# Altium PCB Control_CPUBoard_PCB.PcbDoc (part 2 of 2)
Units mm, origin at the board's own origin, x right, y up, seen from the top; angles counter-clockwise.
Board outline 140 x 120 mm, 2 copper layers (Top Layer, Bottom Layer); 146 components, 135 nets, 512 pads, 156 vias.
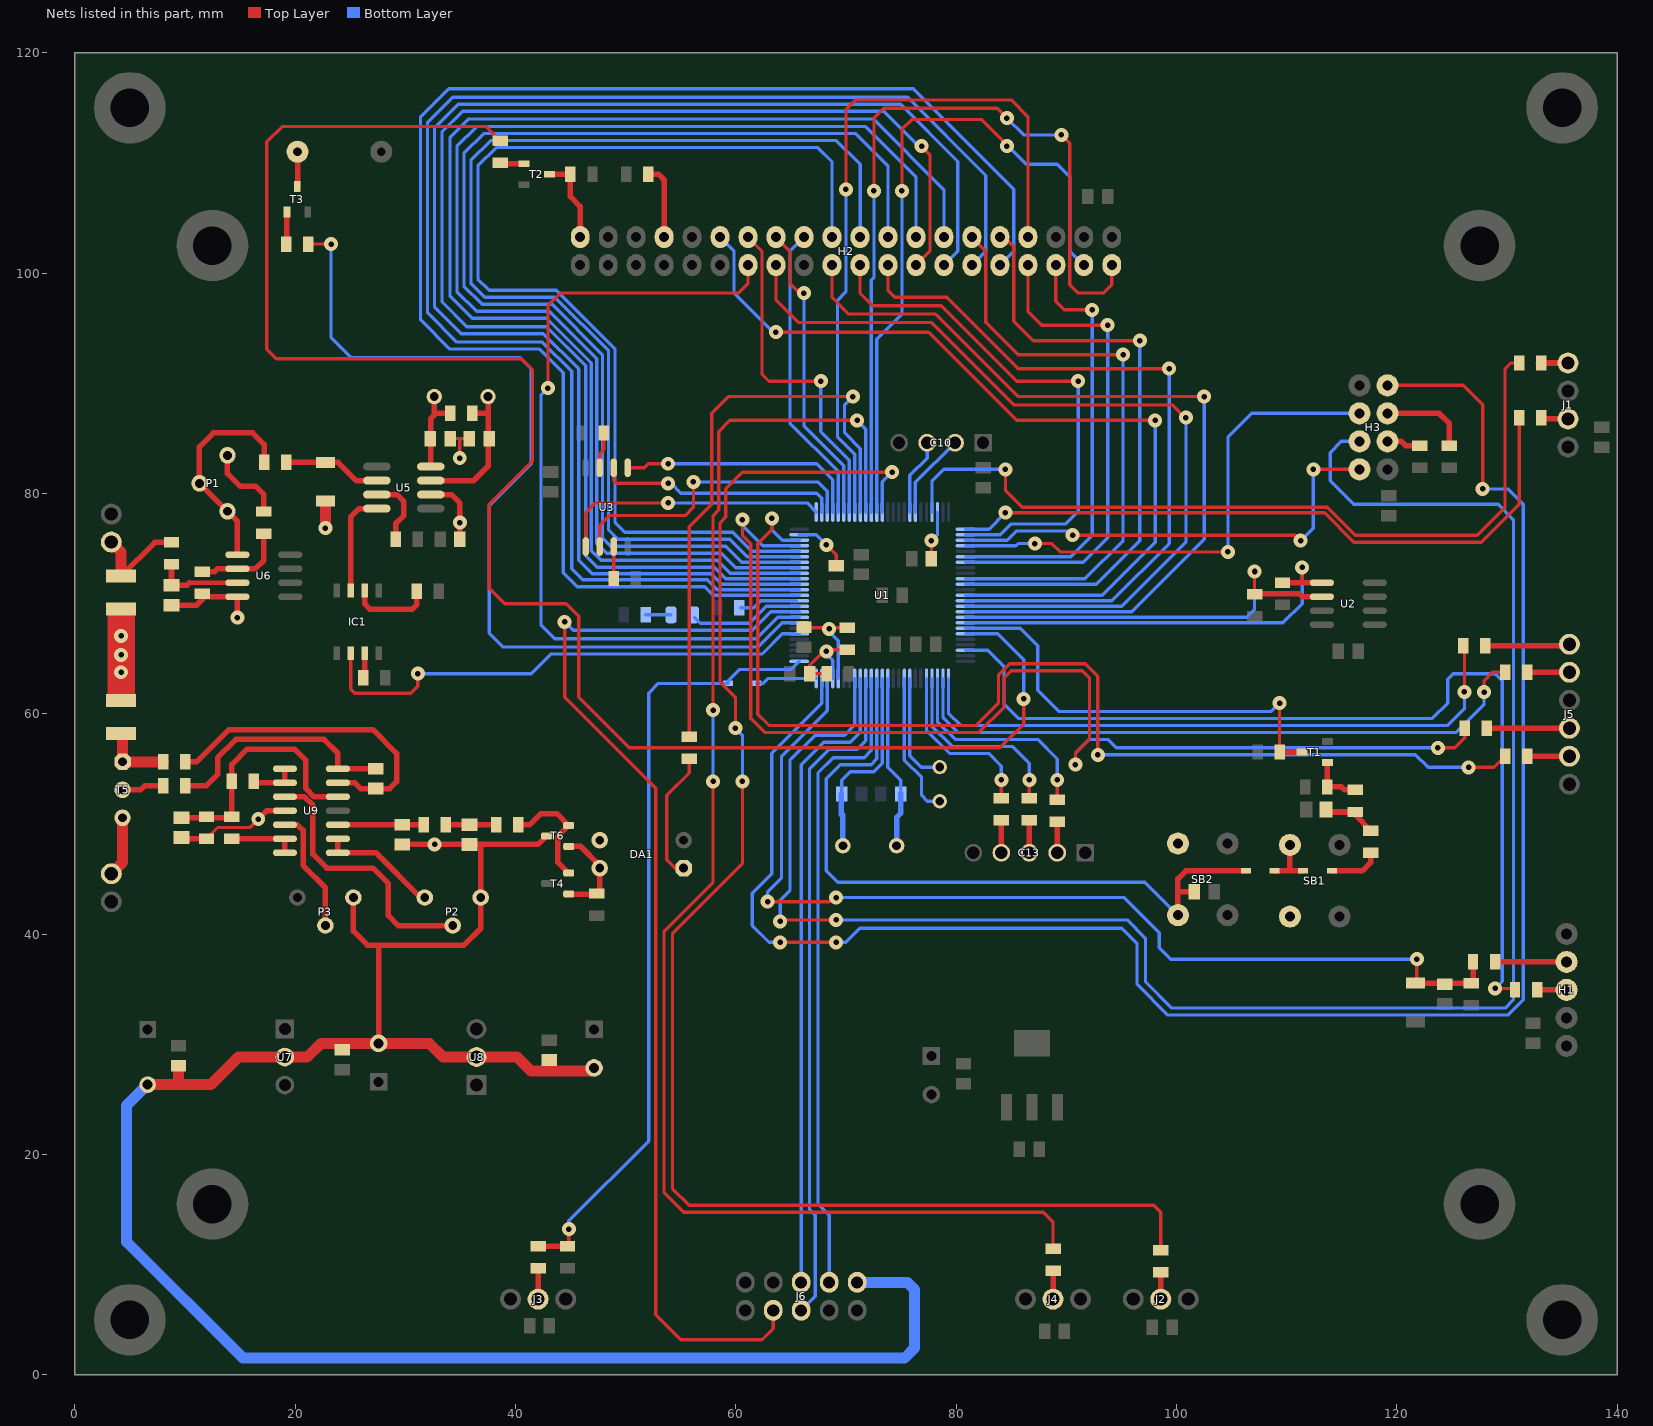
[diagram p2: the nets of this part, all layers, seen from the top]

## Via types
v1: diameter 1.27, hole 0.5, Top Layer to Bottom Layer, tented both sides, 156 vias

## Nets (pads, with @x,y where several pads share a name; then routed paths per layer and width w, separated by ;. In a path a pad name is that pad's centre, name@x,y a point inside that pad or via, vN(x,y) a via of type N, cw(c..) or ccw(c..) an arc to the next point about the centre after c; other vN are vias at no path point) (continued)
GND2: C29.2 C30.1 C31.1 C32.1 C33.2 C34.2 C35.2 C36.2 C37.2 C38.2 C40.1 C41.2 C42.1 D5.2 DA1.3 J6.2 P2.3 P3.3 R39.1 R40.1 R51.1 R53.1 T6.3 U5.2 U6.4 U7.3 U8.2 U9.11 | length 230.3
  Top Layer w0.3: R53.1@11.957,48.676 12.957,49.676 15.894,49.676 v1(16.656,50.438) ; C32.1@34.066,84.982 34.944,84.982 ; v1(34.944,83.204) 34.944,84.982 ; C31.1@35.822,84.982 34.944,84.982
  Top Layer w0.5: C30.1@8.782,69.858 11.073,69.858 11.846,70.631 U6.4@14.764,70.631 v1(14.764,68.739) ; C42.1@9.787,48.66 11.973,48.66 R53.1@11.957,48.676 ; v1(16.656,50.438) 17.418,51.2 U9.11@19.082,51.2 ; P3.3@25.292,43.326 25.292,40.278 26.562,39.008 27.578,39.008 ; C35.2@27.578,30.09 27.578,39.008 ; C41.2@29.737,48.141 v1(32.658,48.141) C40.1@35.833,48.141 42.061,48.141 T6.3@42.834,48.914 ; U5.2@32.314,79.902 34.182,79.902 34.955,79.129 v1(34.955,77.351) C29.2@34.955,75.838 ; 36.849,48.014 P2.3@36.849,43.326 36.849,40.532 35.325,39.008 27.578,39.008
  Top Layer w1: C38.2@6.623,26.348 9.417,26.348 ; C33.2@9.417,28.075 9.417,26.348 ; v1(22.752,76.854) D5.2@22.752,79.295 ; U8.2@36.468,28.467 36.849,28.848 40.151,28.848 41.421,27.578 46.854,27.578 C37.2@47.136,27.86 ; U8.2@36.468,28.848 33.42,28.848 32.178,30.09 C35.2@27.578,30.09 22.343,30.09 21.101,28.848 U7.3@19.069,28.848 14.878,28.848 12.378,26.348 9.417,26.348
  Top Layer w2.5: 4.21,61.995 v1(4.21,63.773) v1(4.21,65.361) v1(4.21,67.075) 4.21,68.726
  Bottom Layer w1: C38.2@6.623,26.348 4.718,24.443 4.718,12.084 15.259,1.543 75.33,1.543 76.219,2.432 76.219,7.766 75.584,8.401 J6.2@71.012,8.401
NetC1_1: C1.1 R2.2 R3.1 | length 4.5
  Top Layer w0.5: C1.1@113.711,51.089 R3.1@116.224,51.089 ; R3.1@116.224,50.803 R2.2@117.621,49.406
NetC3_2: C3.2 D2.2 SB2.2 U1.14 | length 65.9
  Top Layer w0.5: SB2.2@100.131,41.727 100.131,43.707 ; C3.2@101.608,43.834 100.258,43.834 100.131,43.707 ; D2.2@106.288,45.739 100.857,45.739 100.131,45.013 100.131,43.707
  Bottom Layer w0.3: U1.14@72.798,63.208 72.798,55.907 72.282,55.391 69.488,55.391 68.218,54.121 68.218,45.739 69.234,44.723 97.135,44.723 SB2.2@100.131,41.727
NetC7_2: C7.2 R11.1 U1.21 | length 7.6
  Top Layer w0.3: C7.2@66.721,67.821 R11.1@69.488,67.821
  Bottom Layer w0.3: v1(68.472,67.71) 68.472,67.456 69.298,66.63 U1.21@69.298,63.208
NetC10_2: C10.2 U1.69 | length 7.8
  Bottom Layer w0.3: U1.69@76.298,78.308 76.298,80.997 C10.2@79.902,84.601
NetC10_3: C10.3 U1.68 | length 6.9
  Bottom Layer w0.3: U1.68@75.798,78.308 75.798,81.64 77.362,83.204 C10.3@77.362,84.601
NetC12_2: C12.2 R11.2 R12.1 U1.22 | length 8.9
  Top Layer w0.3: R12.1@68.234,63.646 C12.2@66.705,63.646 66.705,64.419 67.964,65.678 68.107,65.821 R11.2@69.869,65.821
  Bottom Layer w0.3: v1(68.218,65.678) 68.091,65.551 68.798,64.844 U1.22@68.798,63.208
NetC13_2: C13.2 R13.1 | length 2.8
  Top Layer w0.5: C13.2@89.173,47.39 R13.1@89.173,50.2
NetC13_3: C13.3 R15.1 | length 2.9
  Top Layer w0.5: C13.3@86.633,47.39 R15.1@86.633,50.327
NetC13_4: C13.4 R14.1 | length 2.9
  Top Layer w0.5: C13.4@84.093,47.39 R14.1@84.093,50.327
NetC14_2: C14.2 Q1.1 U1.13 | length 18.1
  Bottom Layer w0.3: C14.2@69.604,52.724 69.604,53.983 70.377,54.756 72.536,54.756 73.298,55.518 U1.13@73.298,63.208
  Bottom Layer w0.5: C14.2@69.588,52.708 69.588,50.846 69.715,50.846 Q1.1@69.715,48.025
NetC15_2: C15.2 Q1.2 U1.12 | length 15.8
  Bottom Layer w0.3: U1.12@73.798,63.208 73.798,55.145 74.96,53.983 C15.2@74.96,52.724
  Bottom Layer w0.5: Q1.2@74.595,48.025 74.595,50.592 74.96,50.957 C15.2@74.96,52.724
NetC16_2: C16.2 U1.73 | length 5
  Top Layer w0.3: v1(77.743,75.711) 77.754,75.7 C16.2@77.754,73.552
  Bottom Layer w0.3: v1(77.743,75.711) 78.298,76.266 U1.73@78.298,78.308
NetC17_2: C17.2 U1.49 | length 5.1
  Top Layer w0.3: v1(68.218,75.33) 69.107,74.441 C17.2@69.107,73.436
  Bottom Layer w0.3: U1.49@65.748,76.258 67.29,76.258 v1(68.218,75.33)
NetC20_2: C20.2 D3.1 R19.1 R20.2 U1.23 | length 93.9
  Top Layer w0.3: v1(62.884,42.945) 68.472,42.945 v1(69.107,43.326) ; D3.1@121.558,35.678 121.812,35.932 v1(121.812,37.738)
  Top Layer w0.5: D3.1@121.685,35.551 126.753,35.551 R20.2@126.765,35.563 126.908,35.706 R19.1@126.908,37.484
  Bottom Layer w0.3: v1(62.884,42.945) 62.884,43.834 64.154,45.104 64.154,56.153 68.298,60.297 U1.23@68.298,63.208 ; v1(69.107,43.326) 95.269,43.326 98.444,40.151 98.444,38.754 99.46,37.738 v1(121.812,37.738)
NetC30_2: C30.2 R38.2 U6.3 | length 8
  Top Layer w0.4: 10.433,71.901 U6.3@14.764,71.901
  Top Layer w0.5: R38.2@8.782,73.568 C30.2@8.782,71.658 10.19,71.658 10.433,71.901
NetC31_2: C31.2 Q2.1 R41.1 U5.3 | length 13.5
  Top Layer w0.5: U5.3@32.314,81.172 36.214,81.172 37.511,82.469 37.511,87.268 ; R41.1@36.071,87.268 37.511,87.268 ; Q2.1@37.511,88.792 37.511,87.268
NetC32_2: C32.2 Q2.2 R41.2 U5.4 | length 8
  Top Layer w0.5: U5.4@32.314,82.442 32.314,86.797 32.631,87.114 ; Q2.2@32.631,88.792 32.631,87.114 ; R41.2@34.071,87.268 32.785,87.268 32.631,87.114
NetC39_1: C39.1 R50.1 U9.6 | length 29.7
  Top Layer w0.5: R50.1@10.036,55.645 11.068,55.645 13.989,58.566 27.07,58.566 29.218,56.418 29.218,53.856 28.583,53.221 C39.1@27.324,53.221 25.938,53.221 25.419,53.74 U9.6@23.882,53.74
NetC39_2: C39.2 R46.1 U9.7 | length 21.8
  Top Layer w0.5: R46.1@10.036,53.486 11.957,53.486 12.973,54.502 12.973,56.026 14.624,57.677 22.625,57.677 23.882,56.42 U9.7@23.882,55.01 C39.2@27.313,55.01
NetC40_2: C40.2 R47.2 R48.1 | length 4.6
  Top Layer w0.5: R48.1@33.658,49.93 R47.2@38.262,49.93
NetC41_1: C41.1 R48.2 U9.3 | length 7.8
  Top Layer w0.5: U9.3@23.882,49.93 R48.2@31.658,49.93
NetC42_2: C42.2 R45.2 R52.2 R53.2 U9.5 | length 22.8
  Top Layer w0.5: C42.2@9.671,50.576 14.143,50.576 R52.2@14.243,50.676 14.259,50.692 R45.2@14.259,53.867 14.259,55.407 15.64,56.788 19.958,56.788 20.974,55.772 20.974,53.232 21.736,52.47 U9.5@23.882,52.47
NetD1_1: D1.1 D2.1 SB1.2 | length 4.9
  Top Layer w0.5: D2.1@108.888,45.739 D1.1@111.495,45.739 ; 110.291,45.775 SB1.2@110.291,48.1
NetD1_2: D1.2 R2.1 | length 4.7
  Top Layer w0.5: D1.2@114.095,45.739 116.859,45.739 117.621,46.501 R2.1@117.621,47.406
NetD4_1: D4.1 U1.25 | length 5.6
  Bottom Layer w0.3: D4.1@61.898,62.757 62.503,62.757 62.954,63.208 U1.25@67.298,63.208
NetD4_2: D4.2 R23.1 R24.1 U1.26 | length 70.7
  Top Layer w0.3: R23.1@44.85,11.814 v1(44.85,13.227)
  Top Layer w0.5: R24.1@42.056,11.687 R23.1@44.723,11.687
  Bottom Layer w0.3: v1(44.85,13.227) 44.85,13.989 52.089,21.228 52.089,61.868 52.978,62.757 D4.2@59.298,62.757 59.298,62.981 60.344,64.027 65.017,64.027 U1.26@65.748,64.758
NetD5_1: D5.1 R37.2 U5.6 | length 8.9
  Top Layer w0.5: R37.2@19.18,82.823 23.895,82.823 25.546,81.172 U5.6@27.414,81.172
NetDA1_1: DA1.1 R49.2 | length 11.8
  Top Layer w0.3: DA1.1@55.264,45.993 54.502,45.993 53.74,46.755 53.74,52.597 55.772,54.629 R49.2@55.772,55.915
NetDA1_4: DA1.4 R44.1 T4.1 T6.1 | length 8.8
  Top Layer w0.5: T4.1@44.834,43.646 47.345,43.646 R44.1@47.39,43.691 47.644,43.945 DA1.4@47.644,45.993 47.644,46.247 45.927,47.964 T6.1@44.834,47.964
NetH1_3: H1.3 R18.2 | length 2.7
  Top Layer w0.5: R18.2@132.718,34.944 H1.3@135.401,34.944
NetH1_4: H1.4 R19.2 | length 6.5
  Top Layer w0.5: R19.2@128.908,37.484 H1.4@135.401,37.484
NetH2_2: H2.2 U1.61 | length 74.4
  Top Layer w0.3: v1(72.536,107.461) 72.536,114.065 73.425,114.954 83.712,114.954 v1(84.601,114.065) ; v1(89.554,112.541) 90.316,111.779 90.316,98.952 91.078,98.19 93.364,98.19 94.13,98.956 H2.2@94.13,100.73
  Bottom Layer w0.3: U1.61@72.298,78.308 72.298,99.349 72.536,99.587 v1(72.536,107.461) ; v1(84.601,114.065) 86.125,112.541 v1(89.554,112.541)
NetH2_4: H2.4 U1.62 | length 62.4
  Top Layer w0.3: v1(75.076,107.461) 75.076,113.049 75.965,113.938 82.315,113.938 84.411,111.843 84.601,112.033 v1(84.601,111.525)
  Bottom Layer w0.3: U1.62@72.798,78.308 72.798,94.007 75.076,96.285 v1(75.076,107.461) ; v1(84.601,111.525) 84.728,111.525 86.379,109.874 89.173,109.874 90.316,108.731 90.316,102.004 H2.4@91.59,100.73
NetH2_6: H2.6 U1.81 | length 39.7
  Top Layer w0.3: H2.6@89.05,100.73 89.05,97.424 89.808,96.666 v1(92.348,96.666)
  Bottom Layer w0.3: U1.81@80.848,74.258 90.387,74.258 92.348,76.219 v1(92.348,96.666)
NetH2_7: H2.7 U1.58 | length 65.9
  Top Layer w0.3: v1(69.996,107.588) 69.996,114.827 70.885,115.716 84.982,115.716 86.51,114.188 H2.7@86.51,103.27
  Bottom Layer w0.3: v1(69.996,107.588) 69.996,98.317 69.234,97.555 69.234,85.109 70.798,83.545 U1.58@70.798,78.308
NetH2_8: H2.8 U1.82 | length 45.1
  Top Layer w0.3: H2.8@86.51,100.73 86.51,96.535 87.776,95.269 v1(93.745,95.269)
  Bottom Layer w0.3: U1.82@80.848,73.758 91.538,73.758 93.745,75.965 v1(93.745,95.269)
NetH2_9: H2.9 U1.86 | length 56.1
  Top Layer w0.3: H2.9@83.97,103.27 84.347,103.27 85.236,102.381 85.236,95.65 87.014,93.872 v1(96.666,93.872)
  Bottom Layer w0.3: U1.86@80.848,71.758 92.713,71.758 96.666,75.711 v1(96.666,93.872)
NetH2_10: H2.10 U1.38 | length 139.8
  Bottom Layer w0.3: U1.38@65.748,70.758 57.931,70.758 57.169,71.52 45.612,71.52 44.342,72.79 44.342,90.951 42.183,93.11 34.055,93.11 31.388,95.777 31.388,114.192 33.928,116.732 76.092,116.732 85.236,107.588 85.236,101.996 H2.10@83.97,100.73
NetH2_11: H2.11 U1.85 | length 54.5
  Top Layer w0.3: H2.11@81.43,103.27 82.696,102.004 82.696,95.523 85.617,92.602 v1(95.142,92.602)
  Bottom Layer w0.3: U1.85@80.848,72.258 91.689,72.258 95.142,75.711 v1(95.142,92.602)
NetH2_12: H2.12 U1.39 | length 135.6
  Top Layer w0.3: H2.12@81.43,100.73 H2.12@81.934,100.73
  Bottom Layer w0.3: U1.39@65.748,71.258 58.32,71.258 57.423,72.155 46.12,72.155 45.104,73.171 45.104,91.078 42.437,93.745 34.69,93.745 32.023,96.412 32.023,113.684 34.309,115.97 75.584,115.97 82.696,108.858 82.696,101.996 H2.12@81.43,100.73
NetH2_13: H2.13 U1.42 | length 118.9
  Bottom Layer w0.3: U1.42@65.748,72.758 59.487,72.758 58.312,73.933 47.771,73.933 46.882,74.822 46.882,91.84 42.818,95.904 36.087,95.904 34.055,97.936 34.055,112.287 35.755,113.987 72.487,113.987 78.89,107.584 H2.13@78.89,103.27
NetH2_14: H2.14 U1.40 | length 130.4
  Bottom Layer w0.3: U1.40@65.748,71.758 58.709,71.758 57.756,72.711 46.961,72.711 45.739,73.933 45.739,91.298 42.53,94.507 35.071,94.507 32.658,96.92 32.658,113.176 34.817,115.335 74.949,115.335 80.156,110.128 80.156,101.996 H2.14@78.89,100.73
NetH2_15: H2.15 U1.43 | length 114.2
  Bottom Layer w0.3: U1.43@65.748,73.258 60.003,73.258 58.693,74.568 48.279,74.568 47.39,75.457 47.39,92.221 43.072,96.539 36.468,96.539 34.69,98.317 34.69,111.525 36.468,113.303 71.774,113.303 76.35,108.727 H2.15@76.35,103.27
NetH2_16: H2.16 U1.41 | length 125.6
  Top Layer w0.3: H2.16@76.35,100.73 77.616,101.996 77.616,110.763 v1(76.854,111.525)
  Bottom Layer w0.3: U1.41@65.748,72.258 59.098,72.258 58.058,73.298 47.41,73.298 46.374,74.334 46.374,91.586 42.818,95.142 35.574,95.142 33.333,97.383 33.333,112.835 35.198,114.7 73.425,114.7 76.6,111.525 v1(76.854,111.525)
NetH2_17: H2.17 U1.44 | length 109.5
  Bottom Layer w0.3: U1.44@65.748,73.758 60.519,73.758 59.074,75.203 48.66,75.203 47.898,75.965 47.898,92.602 43.326,97.174 36.976,97.174 35.325,98.825 35.325,110.89 37.103,112.668 70.885,112.668 73.81,109.743 H2.17@73.81,103.27
NetH2_18: H2.18 U1.89 | length 67.3
  Top Layer w0.3: H2.18@73.81,100.73 73.81,98.44 74.441,97.809 79.14,97.809 85.617,91.332 v1(99.333,91.332)
  Bottom Layer w0.3: U1.89@80.848,70.258 94.134,70.258 99.333,75.457 v1(99.333,91.332)
NetH2_19: H2.19 U1.45 | length 104.3
  Bottom Layer w0.3: U1.45@65.748,74.258 61.035,74.258 59.455,75.838 49.295,75.838 48.45,76.683 48.45,92.939 43.58,97.809 37.23,97.809 35.96,99.079 35.96,110.255 37.738,112.033 69.107,112.033 71.281,109.859 71.281,103.281 H2.19@71.27,103.27
NetH2_20: H2.20 U1.77 | length 48.6
  Top Layer w0.3: H2.20@71.27,100.73 71.27,98.186 72.409,97.047 78.632,97.047 85.49,90.189 v1(91.078,90.189)
  Bottom Layer w0.3: U1.77@80.848,76.258 84.005,76.258 84.982,77.235 89.935,77.235 91.078,78.378 v1(91.078,90.189)
NetH2_21: H2.21 U1.46 | length 99.1
  Bottom Layer w0.3: U1.46@65.748,74.758 61.424,74.758 59.709,76.473 49.93,76.473 49.041,77.362 49.041,93.11 43.707,98.444 37.611,98.444 36.595,99.46 36.595,109.747 38.246,111.398 67.456,111.398 68.73,110.124 H2.21@68.73,103.27
NetH2_22: H2.22 U1.91 | length 77.8
  Top Layer w0.3: H2.22@68.73,100.73 68.73,97.805 70.25,96.285 78.124,96.285 85.617,88.792 v1(102.508,88.792)
  Bottom Layer w0.3: U1.91@80.848,69.258 95.928,69.258 102.508,75.838 v1(102.508,88.792)
NetH2_23: H2.23 U1.55 | length 27.3
  Bottom Layer w0.3: H2.23@66.19,103.27 64.916,101.996 64.916,86.379 69.298,81.997 U1.55@69.298,78.308
NetH2_25: H2.25 U1.56 | length 28.1
  Top Layer w0.3: H2.25@63.65,103.27 64.916,102.004 64.916,99.079 65.805,98.19 v1(66.186,98.19)
  Bottom Layer w0.3: v1(66.186,98.19) 65.932,98.19 66.186,97.936 66.186,86.125 69.798,82.513 U1.56@69.798,78.308
NetH2_26: H2.26 U1.90 | length 78.6
  Top Layer w0.3: H2.26@63.65,100.73 63.65,97.551 65.678,95.523 77.743,95.523 85.236,88.03 99.629,88.03 100.857,86.802 v1(100.857,86.887)
  Bottom Layer w0.3: U1.90@80.848,69.758 95.031,69.758 100.857,75.584 v1(100.857,86.887)
NetH2_27: H2.27 U1.57 | length 31.5
  Top Layer w0.3: H2.27@61.11,103.27 62.376,102.004 62.376,90.824 63.011,90.189 v1(67.71,90.189)
  Bottom Layer w0.3: v1(67.71,90.189) 67.71,85.617 70.298,83.029 U1.57@70.298,78.308
NetH2_28: H2.28 U1.34 | length 74.6
  Top Layer w0.3: v1(42.945,89.554) 42.945,97.047 44.088,98.19 60.217,98.19 61.11,99.083 H2.28@61.11,100.73
  Bottom Layer w0.3: v1(42.945,89.554) 42.31,88.919 42.31,68.091 43.58,66.821 61.868,66.821 63.805,68.758 U1.34@65.748,68.758
NetH2_29: H2.29 U1.88 | length 78.9
  Top Layer w0.3: v1(63.646,94.634) 77.489,94.634 85.49,86.633 v1(98.063,86.633)
  Bottom Layer w0.3: H2.29@58.57,103.27 59.836,102.004 59.836,98.19 63.392,94.634 v1(63.646,94.634) ; U1.88@80.848,70.758 93.237,70.758 98.063,75.584 v1(98.063,86.633)
NetH2_33: H2.33 R22.2 | length 6.8
  Top Layer w0.5: R22.2@52.073,108.985 52.978,108.985 53.49,108.473 H2.33@53.49,103.27
NetH2_39: H2.39 R28.1 T2.3 | length 8
  Top Layer w0.5: T2.3@43.079,108.985 R28.1@44.993,108.985 44.993,106.937 45.87,106.06 H2.39@45.87,103.27
NetH3_1: H3.1 U1.24 | length 168.4
  Top Layer w0.3: v1(64.027,39.262) v1(69.107,39.262) ; H3.1@119.145,89.808 126.003,89.808 127.781,88.03 v1(127.781,80.41)
  Bottom Layer w0.3: v1(64.027,39.262) 63.011,39.262 61.487,40.786 61.487,43.707 63.265,45.485 63.265,56.407 67.798,60.94 U1.24@67.798,63.208 ; v1(69.107,39.262) 69.996,39.262 71.266,40.532 95.015,40.532 96.412,39.135 96.412,35.452 99.206,32.658 130.067,32.658 131.464,34.055 131.464,79.013 130.067,80.41 v1(127.781,80.41)
NetH3_3: H3.3 R26.1 | length 8
  Top Layer w0.5: H3.3@119.145,87.268 123.844,87.268 124.733,86.379 R26.1@124.733,84.331
NetH3_4: H3.4 U1.79 | length 47.5
  Top Layer w0.3: v1(87.141,75.457) 88.665,75.457 89.427,74.695 v1(104.667,74.695)
  Bottom Layer w0.3: U1.79@80.848,75.258 85.418,75.258 85.617,75.457 v1(87.141,75.457) ; v1(104.667,74.695) 104.667,85.109 106.826,87.268 H3.4@116.605,87.268
NetH3_5: H3.5 R27.1 | length 3.1
  Top Layer w0.5: H3.5@119.145,84.728 120.415,84.728 120.812,84.331 R27.1@122.066,84.331
NetH3_6: H3.6 U1.18 | length 166.2
  Top Layer w0.3: v1(64.027,41.167) 64.154,41.294 v1(69.107,41.294)
  Bottom Layer w0.3: v1(64.027,41.167) 64.027,43.072 64.916,43.961 64.916,55.772 67.202,58.058 69.869,58.058 70.798,58.987 U1.18@70.798,63.208 ; v1(69.107,41.294) 95.523,41.294 97.174,39.643 97.174,35.706 99.587,33.293 129.813,33.293 130.575,34.055 130.575,77.616 129.178,79.013 116.097,79.013 113.938,81.172 113.938,83.712 114.954,84.728 H3.6@116.605,84.728
NetH3_8: H3.8 U1.78 | length 42.2
  Top Layer w0.3: v1(90.57,76.219) 110.763,76.219 v1(111.271,75.711) ; v1(112.414,82.188) H3.8@116.605,82.188
  Bottom Layer w0.3: U1.78@80.848,75.758 84.648,75.758 85.49,76.6 90.189,76.6 v1(90.57,76.219) ; v1@111.318,75.758 112.414,76.854 v1(112.414,82.188)
NetHA1_2: HA1.2 T3.3 | length 3.2
  Top Layer w0.5: T3.3@20.222,107.859 HA1.2@20.222,111.017
NetIC1_2: IC1.2 R42.1 | length 7.5
  Top Layer w0.5: IC1.2@26.308,71.195 26.308,69.996 26.816,69.488 30.626,69.488 31.023,69.885 R42.1@31.023,71.139
NetIC1_3: IC1.3 U5.8 | length 9.4
  Top Layer w0.5: IC1.3@25.038,71.195 25.038,77.87 25.8,78.632 U5.8@27.414,78.632
NetIC1_6: IC1.6 U1.31 | length 47
  Top Layer w0.3: IC1.6@25.038,65.495 25.038,62.249 25.419,61.868 30.499,61.868 31.134,62.503 v1(31.134,63.646)
  Bottom Layer w0.3: v1(31.134,63.646) 41.421,63.646 43.199,65.424 62.376,65.424 64.21,67.258 U1.31@65.748,67.258
NetIC1_7: IC1.7 R43.1 | length 2.2
  Top Layer w0.5: R43.1@26.308,63.265 IC1.7@26.308,65.495
NetJ1_2: J1.2 R4.2 | length 2.3
  Top Layer w0.5: R4.2@133.226,86.76 J1.2@135.528,86.76
NetJ1_4: J1.4 R5.2 | length 2.7
  Top Layer w0.5: R5.2@132.845,91.84 J1.4@135.528,91.84
NetJ2_2: J2.2 R21.2 | length 2.4
  Top Layer w0.5: J2.2@98.571,6.877 R21.2@98.571,9.306
NetJ3_2: J3.2 R24.2 | length 2.8
  Top Layer w0.5: J3.2@42.056,6.877 R24.2@42.056,9.687
NetJ4_2: J4.2 R25.2 | length 2.6
  Top Layer w0.5: J4.2@88.792,6.877 R25.2@88.792,9.433
NetJ5_2: J5.2 R29.2 | length 3.8
  Top Layer w0.5: R29.2@131.829,56.153 J5.2@135.655,56.153
NetJ5_3: J5.3 R31.2 | length 7.5
  Top Layer w0.5: R31.2@128.146,58.693 J5.3@135.655,58.693
NetJ5_5: J5.5 R30.2 | length 3.8
  Top Layer w0.5: R30.2@131.829,63.773 J5.5@135.655,63.773
NetJ5_6: J5.6 R34.2 | length 7.5
  Top Layer w0.5: R34.2@128.019,66.186 J5.6@135.528,66.186
NetJ6_4: J6.4 U1.15 | length 58.9
  Bottom Layer w0.3: J6.4@68.472,8.401 68.472,14.497 67.456,15.513 67.456,54.629 68.853,56.026 71.647,56.026 72.298,56.677 U1.15@72.298,63.208
NetJ6_5: J6.5 U1.16 | length 61.7
  Bottom Layer w0.3: J6.5@65.932,5.861 67.202,7.131 67.202,14.497 66.694,15.005 66.694,55.01 68.472,56.788 71.012,56.788 71.798,57.574 U1.16@71.798,63.208
NetJ6_6: J6.6 U1.17 | length 58.4
  Bottom Layer w0.3: J6.6@65.932,8.401 65.932,55.391 67.964,57.423 70.377,57.423 71.298,58.344 U1.17@71.298,63.208
NetJ6_7: J6.7 U1.35 | length 102.3
  Top Layer w0.3: v1(44.469,68.345) 44.469,61.487 52.724,53.232 52.724,5.48 55.01,3.194 62.376,3.194 63.392,4.21 J6.7@63.392,5.861
  Bottom Layer w0.3: v1(44.469,68.345) 45.231,67.583 61.487,67.583 63.162,69.258 U1.35@65.748,69.258
NetJ7_2: J7.2 R38.1 R39.2 | length 9.3
  Top Layer w0.5: J7.2@3.324,75.568 J7.2@3.34,75.568 ; R39.2@4.21,72.512 7.266,75.568 R38.1@8.782,75.568
  Top Layer w1: J7.2@3.324,75.584 3.34,75.568 4.21,74.698 R39.2@4.21,72.512
NetJ8_2: J8.2 T5.1 | length 5.5
  Top Layer w1: J8.2@3.319,45.485 4.337,46.504 T5.1@4.337,50.565
NetLD1_1: LD1.1 U1.36 | length 10.3
  Bottom Layer w0.3: LD1.1@56.28,68.726 56.788,68.218 61.233,68.218 62.773,69.758 U1.36@65.748,69.758
NetLD1_2: LD1.2 R9.2 | length 2.3
  Bottom Layer w0.3: R9.2@51.819,68.98 LD1.2@54.121,68.98
NetP1_1: P1.1 R36.1 | length 7.3
  Top Layer w0.5: P1.1@13.862,83.458 13.862,81.807 15.005,80.664 16.402,80.664 17.164,79.902 R36.1@17.164,78.362
NetP1_2: P1.2 P1.3 R37.1 U6.1 | length 19.7
  Top Layer w0.5: U6.1@14.764,74.441 14.764,77.476 P1.3@13.862,78.378 P1.2@11.322,80.918 11.322,84.22 12.592,85.49 16.148,85.49 17.18,84.458 R37.1@17.18,82.823
NetP2_1: P2.1 U9.1 U9.2 | length 10.8
  Top Layer w0.5: U9.2@23.882,48.66 U9.1@23.882,47.39 27.324,47.39 31.388,43.326 P2.1@31.769,43.326
NetP2_2: P2.2 U9.10 | length 24.4
  Top Layer w0.5: U9.10@19.082,52.47 20.852,52.47 21.609,51.713 21.609,47.263 22.879,45.993 27.07,45.993 28.467,44.596 28.467,41.675 29.356,40.786 P2.2@34.309,40.786
NetP3_2: P3.2 U9.12 | length 11.3
  Top Layer w0.5: U9.12@19.082,49.93 20.212,49.93 20.72,49.422 20.72,46.247 22.752,44.215 P3.2@22.752,40.786
NetR1_1: R1.1 R3.2 T1.1 | length 4.9
  Top Layer w0.5: T1.1@113.668,55.561 R1.1@113.668,53.359 114.954,53.359 115.224,53.089 R3.2@116.224,53.089
NetR4_1: R4.1 U1.76 | length 61.3
  Top Layer w0.3: v1(84.474,78.251) 113.43,78.251 116.097,75.584 127.654,75.584 131.099,79.029 R4.1@131.099,86.887
  Bottom Layer w0.3: U1.76@80.848,76.758 82.981,76.758 v1(84.474,78.251)
NetR5_1: R5.1 U1.72 | length 74
  Top Layer w0.3: v1(84.474,82.188) 84.474,80.283 85.998,78.759 113.684,78.759 116.224,76.219 127.273,76.219 129.813,78.759 129.813,91.332 130.321,91.84 R5.1@131.099,91.84
  Bottom Layer w0.3: U1.72@77.798,78.308 77.798,81.1 78.886,82.188 v1(84.474,82.188)
NetR6_1: R6.1 U1.37 | length 5.3
  Bottom Layer w0.3: R6.1@60.455,69.615 61.614,69.615 62.257,70.258 U1.37@65.494,70.258
NetR7_2: R7.2 T1.3 U1.94 | length 40.8
  Top Layer w0.3: R7.2@109.35,56.534 v1(109.35,60.963)
  Top Layer w0.5: R7.2@109.35,56.534 T1.3@111.391,56.534
  Bottom Layer w0.3: U1.94@80.848,67.758 85.823,67.758 87.395,66.186 87.395,62.122 89.3,60.217 108.604,60.217 v1(109.35,60.963)
NetR8_1: R8.1 U1.92 U2.6 | length 37.9
  Top Layer w0.3: R8.1@107.08,71.028 v1(107.08,72.917)
  Top Layer w0.5: R8.1@107.223,70.885 111.144,70.885 111.398,70.631 U2.6@113.189,70.631
  Bottom Layer w0.3: U1.92@80.848,68.758 106.35,68.758 107.08,69.488 v1(107.08,72.917)
NetR10_1: R10.1 U1.93 U2.5 | length 39.4
  Top Layer w0.3: 111.398,71.901 v1(111.398,73.298)
  Top Layer w0.5: R10.1@109.763,71.901 111.398,71.901 U2.5@113.189,71.901
  Bottom Layer w0.3: U1.93@80.848,68.258 109.66,68.258 111.398,69.996 v1(111.398,73.298)
NetR13_2: R13.2 U1.3 | length 19.9
  Top Layer w0.3: R13.2@89.173,52.2 v1(89.173,53.994)
  Bottom Layer w0.3: U1.3@78.298,63.208 78.298,59.281 79.902,57.677 87.395,57.677 89.173,55.899 v1(89.173,53.994)
NetR14_2: R14.2 U1.5 | length 15.8
  Top Layer w0.3: R14.2@84.093,52.327 v1(84.093,53.994)
  Bottom Layer w0.3: U1.5@77.298,63.208 77.298,58.503 79.394,56.407 82.95,56.407 84.093,55.264 v1(84.093,53.994)
NetR15_2: R15.2 U1.4 | length 17.7
  Top Layer w0.3: R15.2@86.633,52.327 v1(86.633,53.994)
  Bottom Layer w0.3: U1.4@77.798,63.208 77.798,58.892 79.648,57.042 85.109,57.042 86.633,55.518 v1(86.633,53.994)
NetR16_1: R16.1 U3.3 | length 2.9
  Top Layer w0.3: R16.1@48.914,72.298 U3.3@48.914,75.184
NetR17_1: R17.1 U3.7 | length 3.3
  Top Layer w0.3: U3.7@47.644,82.334 47.644,83.585 48.009,83.95 R17.1@48.009,85.49
NetR18_1: R18.1 U1.98 | length 86.4
  Top Layer w0.3: v1(128.924,35.071) R18.1@130.591,35.071
  Bottom Layer w0.3: U1.98@80.848,65.758 82.87,65.758 84.347,64.281 84.347,60.852 85.617,59.582 123.209,59.582 124.606,60.979 124.606,63.138 125.114,63.646 128.924,63.646 129.559,63.011 129.559,35.706 v1(128.924,35.071)
NetR21_1: R21.1 U1.63 | length 135.6
  Top Layer w0.3: v1(59.963,58.693) 59.963,61.487 58.566,62.884 58.566,77.362 59.074,77.87 59.074,80.41 60.598,81.934 v1(74.187,81.934) ; v1(60.598,53.867) 60.598,46.374 54.248,40.024 54.248,16.91 55.772,15.386 97.936,15.386 98.571,14.751 R21.1@98.571,11.306
  Bottom Layer w0.3: v1(59.963,58.693) 60.598,58.058 v1(60.598,53.867) ; U1.63@73.298,78.308 73.298,81.045 v1(74.187,81.934)
NetR25_1: R25.1 U1.60 | length 131.6
  Top Layer w0.3: v1(57.931,53.867) 57.931,44.723 53.486,40.278 53.486,16.529 55.264,14.751 87.903,14.751 88.792,13.862 R25.1@88.792,11.433 ; v1(57.931,60.344) 57.931,77.997 58.439,78.505 58.439,85.617 59.455,86.633 v1(71.012,86.633)
  Bottom Layer w0.3: v1(57.931,53.867) v1(57.931,60.344) ; v1(71.012,86.633) 71.798,85.847 U1.60@71.798,78.308
NetR29_1: R29.1 U1.48 | length 102.6
  Top Layer w0.3: v1(63.265,77.743) 63.265,76.727 61.995,75.457 61.995,59.963 63.011,58.947 81.807,58.947 83.839,60.979 83.839,63.519 84.855,64.535 91.713,64.535 92.856,63.392 v1(92.856,56.28) ; v1(126.511,55.137) 128.813,55.137 R29.1@129.702,56.026
  Bottom Layer w0.3: v1(63.265,77.743) 63.265,76.727 64.234,75.758 U1.48@65.748,75.758 ; v1(92.856,56.28) 121.685,56.28 122.828,55.137 v1(126.511,55.137)
NetR30_1: R30.1 U1.2 | length 58.7
  Top Layer w0.3: v1(127.908,61.979) 127.908,63.011 128.67,63.773 R30.1@129.829,63.773
  Bottom Layer w0.3: U1.2@78.798,63.208 78.798,59.67 80.156,58.312 125.368,58.312 127.908,60.852 v1(127.908,61.979)
NetR31_1: R31.1 U1.47 | length 107.1
  Top Layer w0.3: v1(60.598,77.616) 60.598,76.219 61.36,75.457 61.36,59.582 62.63,58.312 82.061,58.312 84.347,60.598 84.347,63.265 84.982,63.9 91.459,63.9 92.094,63.265 92.094,57.677 90.824,56.407 v1(90.824,55.391) ; v1(123.717,56.915) 125.241,56.915 126.146,57.82 R31.1@126.146,58.693
  Bottom Layer w0.3: v1(60.598,77.616) 60.598,77.108 62.448,75.258 U1.47@65.748,75.258 ; v1(90.824,55.391) 90.824,56.407 92.094,57.677 93.745,57.677 94.507,56.915 v1@123.844,56.915
NetR32_1: R32.1 U1.95 | length 159.3
  Top Layer w0.3: R32.1@38.627,112.017 37.341,113.303 18.815,113.303 17.418,111.906 17.418,93.11 18.307,92.221 40.532,92.221 41.548,91.205 41.548,82.95 37.611,79.013 37.611,71.393 39.008,69.996 44.596,69.996 45.739,68.853 45.739,61.487 50.311,56.915 83.966,56.915 86.125,59.074 v1(86.125,61.36)
  Bottom Layer w0.3: U1.95@80.848,67.258 83.783,67.258 86.125,64.916 v1(86.125,61.36)
NetR32_2: R32.2 T2.1 | length 2.1
  Top Layer w0.5: R32.2@38.688,109.935 T2.1@40.779,109.935
NetR33_1: R33.1 U1.33 | length 84.9
  Top Layer w0.3: R33.1@21.339,102.635 v1(23.26,102.635)
  Bottom Layer w0.3: v1(23.26,102.635) 23.26,94.126 25.038,92.348 40.405,92.348 41.421,91.332 41.421,82.696 37.611,78.886 37.611,67.329 38.881,66.059 61.995,66.059 64.194,68.258 U1.33@65.748,68.258
NetR33_2: R33.2 T3.1 | length 2.9
  Top Layer w0.5: R33.2@19.262,102.685 T3.1@19.262,105.549
NetR34_1: R34.1 U1.1 | length 56.8
  Top Layer w0.3: R34.1@125.876,66.043 126.13,65.789 v1(126.13,61.995)
  Bottom Layer w0.3: U1.1@79.298,63.208 79.298,60.059 80.41,58.947 124.606,58.947 126.13,60.471 v1(126.13,61.995)
NetR35_1: R35.1 U5.7 | length 6.5
  Top Layer w0.5: U5.7@27.414,79.902 29.229,79.902 29.864,79.267 29.864,77.997 29.118,77.251 R35.1@29.118,75.838
NetR36_2: R36.2 R40.2 U6.2 | length 8.4
  Top Layer w0.5: R40.2@11.576,72.901 12.703,72.901 12.973,73.171 U6.2@14.764,73.171 16.402,73.171 17.164,73.933 R36.2@17.164,76.362
NetR45_1: R45.1 U9.8 U9.9 | length 4
  Top Layer w0.5: R45.1@16.386,53.74 U9.9@19.082,53.74 U9.8@19.082,55.01
NetR46_2: R46.2 T5.2 | length 3.9
  Top Layer w0.5: T5.2@4.337,53.105 5.988,53.105 6.369,53.486 R46.2@8.036,53.486
NetR47_1: R47.1 T4.2 T6.2 | length 10.6
  Top Layer w0.5: R47.1@40.262,49.93 41.294,49.93 42.31,50.946 43.752,50.946 T6.2@44.834,49.864 43.834,48.864 43.834,46.546 T4.2@44.834,45.546
NetR49_1: R49.1 U1.59 | length 55
  Top Layer w0.3: R49.1@55.772,57.915 55.772,76.981 57.804,79.013 57.804,87.268 59.328,88.792 v1(70.631,88.792)
  Bottom Layer w0.3: v1(70.631,88.792) 69.869,88.03 69.869,85.49 71.298,84.061 U1.59@71.298,78.308
NetR50_2: R50.2 R51.2 T5.3 | length 6.1
  Top Layer w1: R51.2@4.337,58.082 T5.3@4.337,55.645 R50.2@8.036,55.645
NetR52_1: R52.1 U9.13 U9.14 | length 6.1
  Top Layer w0.5: R52.1@14.243,48.676 19.066,48.676 U9.13@19.082,48.66 U9.14@19.082,47.39
NetU1_8: U1.8 Y1.2 | length 10.1
  Bottom Layer w0.3: U1.8@75.798,63.208 75.798,56.193 76.828,55.163 Y1.2@78.505,55.163
NetU1_9: U1.9 Y1.1 | length 13.1
  Bottom Layer w0.3: U1.9@75.298,63.208 75.298,55.804 76.854,54.248 76.854,52.597 77.388,52.063 Y1.1@78.505,52.063
NetU1_51: U1.51 U3.1 | length 24.7
  Top Layer w0.3: U3.1@46.374,75.184 46.374,78.251 47.263,79.14 v1(53.867,79.14)
  Bottom Layer w0.3: v1(53.867,79.14) 66.466,79.14 U1.51@67.298,78.308
NetU1_52: U1.52 U3.6 | length 21.7
  Top Layer w0.3: U3.6@48.914,82.334 48.914,81.172 49.168,80.918 v1(53.867,80.918)
  Bottom Layer w0.3: v1@54.121,80.918 55.01,80.029 67.329,80.029 67.798,79.56 U1.52@67.798,78.308
NetU1_53: U1.53 U3.2 | length 27.8
  Top Layer w0.3: U3.2@47.644,75.184 47.644,77.108 48.533,77.997 55.391,77.997 56.153,78.759 v1(56.153,81.045)
  Bottom Layer w0.3: v1(56.153,81.045) 67.456,81.045 68.298,80.203 U1.53@68.298,78.308
NetU1_54: U1.54 U3.5 | length 22.3
  Top Layer w0.3: U3.5@50.184,82.334 51.708,82.334 52.07,82.696 v1(53.867,82.696)
  Bottom Layer w0.3: v1(53.867,82.696) 67.329,82.696 68.798,81.227 U1.54@68.798,78.308
pads on no net: B1.1 B2.1 B3.1 B4.1 B5.1 B6.1 B7.1 B8.1 H1.5 H2.5 H2.24 H2.30 H2.31 H2.32 H2.34 H2.35 H2.36 H2.38 H2.40 IC1.1 IC1.4 J6.9 J6.10 U1.7 U1.29 U1.30 U1.32 U1.64 U1.65 U1.66 U1.67 U1.70 U1.71 U1.80 U1.83 U1.84 U1.87 U1.96 U1.97 U5.5 U6.5 U6.6 U6.7

## Polygon pours and split planes (outlines as drawn)
GND2 on Bottom Layer "Bottom Layer- GND2" (solid, remove dead copper, pour order 5): 0.527,91.205 40.532,91.205 40.532,83.331 36.976,79.775 36.341,79.14 36.341,67.456 31.642,67.456 29.737,65.551 29.737,59.963 29.737,58.82 31.515,57.042 31.642,56.915 31.642,53.994 48.025,53.994 50.819,51.2 50.819,40.659 50.819,26.689 47.263,23.133 44.596,20.466 7.131,20.466 0.654,20.466 0.527,20.593
GND on Bottom Layer "Bottom Layer- GND" (solid, remove dead copper, pour order 7): 0.527,118.637 0.527,93.364 0.527,92.729 1.67,91.586 41.04,91.586 41.04,83.077 36.976,79.013 36.722,78.759 36.722,67.202 32.15,67.202 30.245,65.297 30.245,59.328 30.245,59.074 31.769,57.55 32.277,57.042 32.277,56.788 32.277,55.137 32.785,54.629 32.912,54.502 48.406,54.502 51.2,51.708 51.2,25.673 51.2,25.546 45.104,19.45 33.166,19.45 33.166,1.67 34.055,0.781 138.703,0.781 139.211,1.289 139.211,118.256 139.211,118.383 137.941,119.653 1.417,119.527
+3V3 on Top Layer "Bottom Layer- 3V3" (solid, remove dead copper, pour order 6): 82.188,39.643 82.188,27.959 82.188,27.705 83.077,26.816 83.204,26.689 94.634,26.689 95.777,27.832 95.777,39.77 82.188,39.77
GND on Top Layer "Top Layer- GND" (solid, remove dead copper, pour order 8): 0.527,118.637 0.527,92.729 1.67,91.586 40.405,91.586 40.532,91.586 40.786,91.332 40.913,91.205 40.913,83.204 40.913,83.077 36.976,79.14 36.976,66.948 32.15,66.948 30.372,65.17 30.245,65.043 30.245,59.074 32.277,57.042 32.277,55.137 32.912,54.502 33.039,54.375 48.533,54.375 51.2,51.708 51.2,25.546 45.104,19.45 33.166,19.45 33.166,2.432 34.817,0.781 138.703,0.781 139.211,1.289 139.211,118.383 137.941,119.653 137.814,119.526 1.416,119.526

## Silkscreen, mask and mechanical layers (free items; w line width, h text height)
Top Overlay:
  lines w0.254: 29.228,86.887 29.228,85.745 29.991,84.982 31.388,84.982
  text "LCD" at 97.301,101.365 h1.52
Bottom Overlay:
  lines w0.254: 93.872,79.14 93.872,93.951 121.304,93.951 121.304,79.14 93.872,79.14
  text "Debug" at 82.315,87.522 h1.52
  text "SWD" at 129.432,85.871 h1.52 r270
  text "ESP-01" at 113.303,84.728 h3
  text "AIN 4..20 mA" at 7.385,68.091 h1.52 r270
  text "Power module" at 129.178,51.073 h1.52 r270
  text "Min" at 24.276,48.914 h1.52
  text "Max" at 36.468,48.914 h1.52
  text "DIO" at 89.046,43.072 h1.52
  text "AOUT 4..20 mA" at 7.512,38.881 h1.52 r270
  text "Reset" at 105.683,37.992 h1.52
  text "Boot" at 115.208,37.992 h1.52
  text "Spirt controller v. 2.0" at 122.193,32.785 h1.52
  text "Control module" at 122.32,29.356 h1.52
  text "Alco sensor" at 130.702,26.816 h1.52 r270
  text "CPU PCB v. 1.0" at 122.066,26.181 h1.52
  text "Nikopol (C)" at 122.066,23.006 h1.52
  text "1-Wire" at 45.485,15.005 h1.52
  text "Power Supply" at 75.457,15.005 h1.52
  text "PWM 2" at 92.094,15.005 h1.52
  text "Water sen." at 108.477,15.005 h1.52
outlline:
  the board outline again, w0.254

## Text inside footprints (layer, text, board x,y; h text height)
J1: Mechanical 14 "1" at 136.923,84.01 h1 r270; Bottom Overlay "1" at 136.923,84.01 h1 r270
J2: Mechanical 14 "1" at 101.321,8.277 h1; Bottom Overlay "1" at 101.321,8.277 h1
J3: Mechanical 14 "1" at 44.806,8.277 h1; Bottom Overlay "1" at 44.806,8.277 h1
J4: Mechanical 14 "1" at 91.542,8.277 h1; Bottom Overlay "1" at 91.542,8.277 h1
J5: Mechanical 14 "1" at 137.05,53.393 h1 r270; Bottom Overlay "1" at 137.05,53.393 h1 r270
J6: Mechanical 14 "10" at 59.337,7.896 h1.2; Mechanical 14 "1" at 73.212,5.296 h1.2; Bottom Overlay "10" at 59.337,7.896 h1.2; Bottom Overlay "1" at 73.212,5.296 h1.2
J7: Mechanical 14 "1" at 1.924,78.344 h1 r90; Bottom Overlay "1" at 1.924,78.344 h1 r90
J8: Mechanical 14 "1" at 4.719,42.725 h1 r270; Bottom Overlay "1" at 4.719,42.725 h1 r270
U7: Bottom Overlay "3" at 22.744,29.348 h1.5 r90; Bottom Overlay "2" at 22.744,26.808 h1.5 r90; Bottom Overlay "1" at 22.744,31.638 h1.5 r90